# Allegro board ex2_RLC.brd
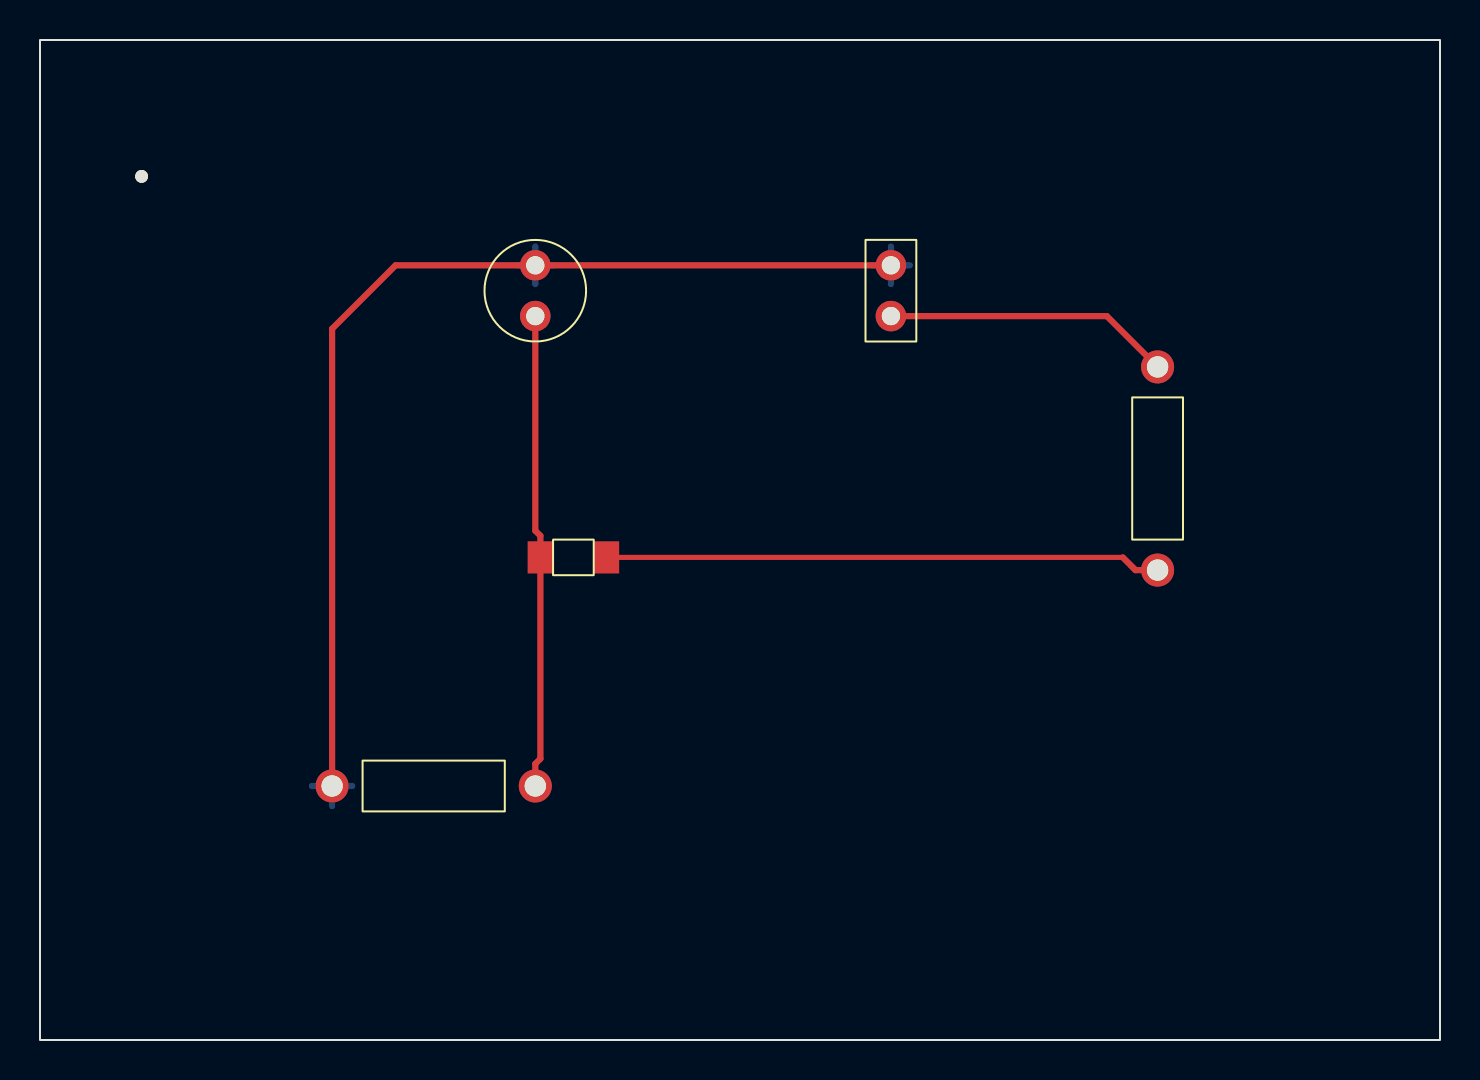
[diagram p0: board, top side]
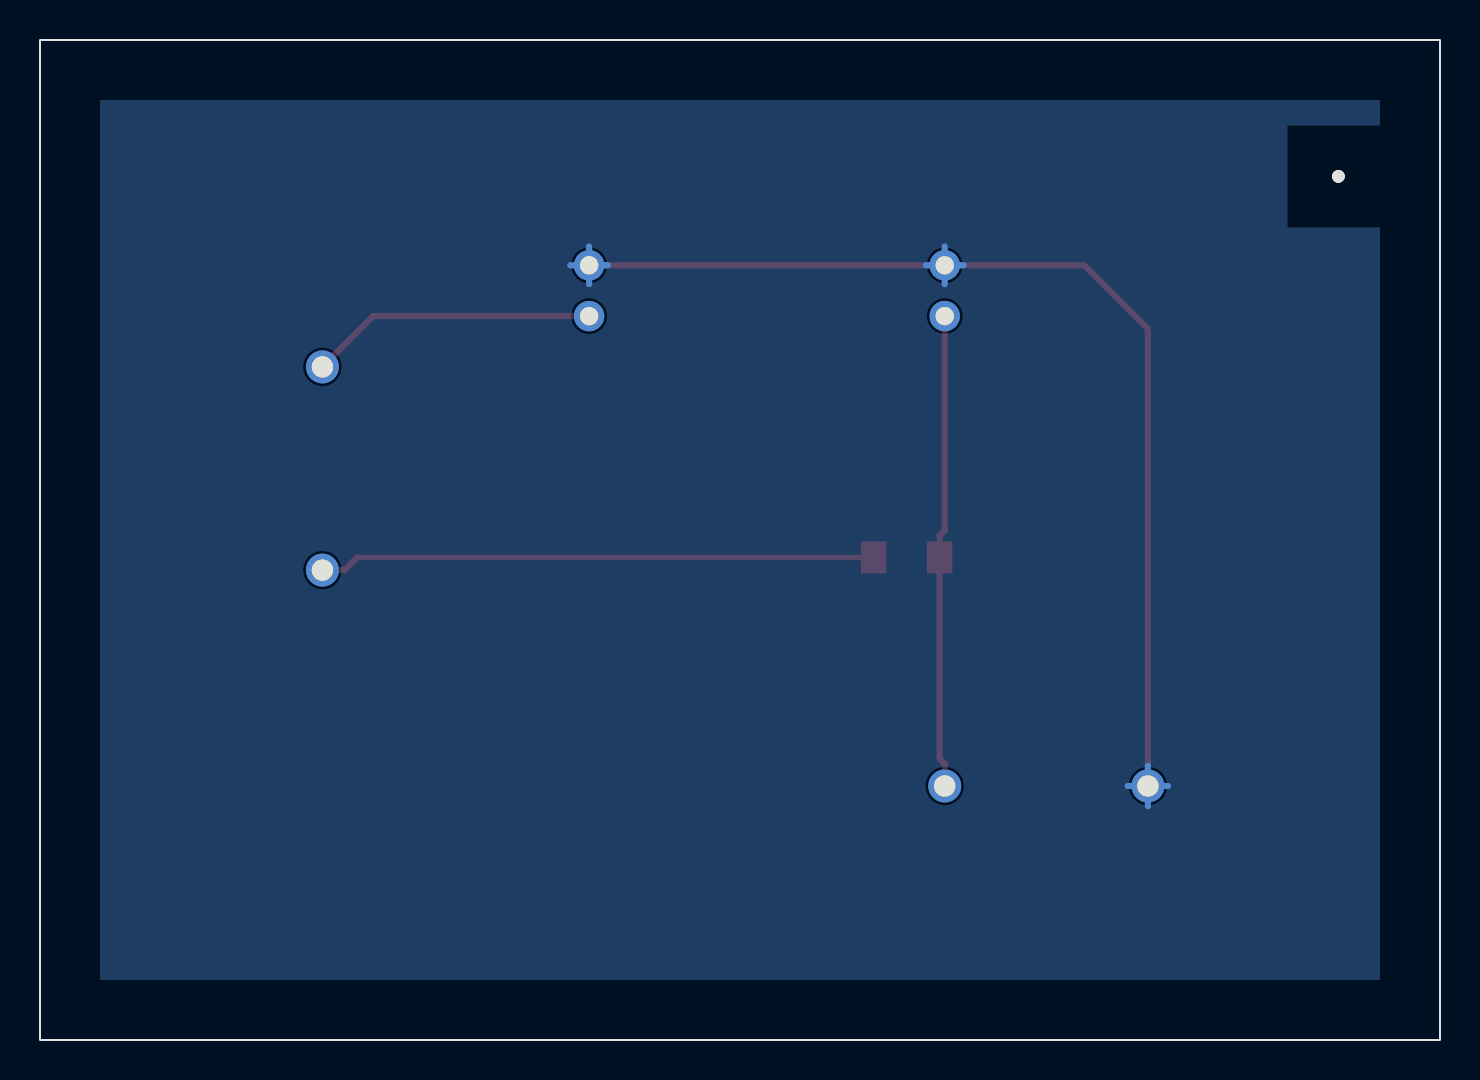
[diagram p1: board, bottom side, seen from below]

Outline 70 x 50 mm; copper layers: TOP, BOTTOM. Coordinates in mm from the lower left corner of the outline.
Outline path: rectangle 0,0 70,50

## Design rules (mm)
net group CLS3: nets N00069
net group POWERNETS: nets VCC

## Placement (name value [footprint] x y rotation side)
C1  1u  [CAP196]  24.77 36.2 0 top
J1  CON2  [JUMPER2]  42.55 36.2 90 top
L1  100n  [SMDRES]  26.67 24.13 180 top
NOREF  -  [unnamed]  5.08 43.18 0 top
R1  330  [RES400]  55.88 33.66 180 top
R2  330  [RES400]  24.77 12.7 90 top

## Library data of the parts
C1 = CAP NP: Tolerance: ***; User Part Number: ***
J1 = CON2: User Part Number: ***
L1 = INDUCTOR: Tolerance: ***; User Part Number: ***
R1 R2 = R: Tolerance: ***; User Part Number: ***

## Footprints (pads in the part's own frame, mm; a bottom-side part is the same pattern mirrored in y, then rotated)
CAP196
  round 1.524 hole 0.914: 1(0,0) 2(0,2.54)
JUMPER2
  round 1.524 hole 0.914: 1(0,0) 2(2.54,0)
RES400
  round 1.651 hole 1.067: 1(0,0) 2(0,10.16)
SMDRES
  rect 1.27x1.6 smd: 1(-1.651,0) 2(1.651,0)
unnamed
  round 0.635 hole 3.175 unplated: (0,0)

## Nets
GND: C1.2 J1.2 R2.2
VCC: J1.1 R1.1
N00069: L1.1 R1.2
N00128: C1.1 L1.2 R2.1

## Routing (per net, layer and track width the routed paths; a pad name or vN(x,y) marks a point on that pad's centre or on a via; arc(x,y) is an arc through that point)
GND: length 63.7
  TOP w0.308: R2.2 14.61,35.56 17.78,38.73 C1.2 J1.2
  BOTTOM w0.308: J1.2 43.49,38.73 ; J1.2 42.55,37.79 ; J1.2 41.6,38.73 ; J1.2 42.55,39.68 ; 13.6,12.7 R2.2 ; R2.2 14.61,11.69 ; R2.2 15.61,12.7 ; R2.2 14.61,13.71 ; 24.77,37.79 C1.2 ; C1.2 25.71,38.73 ; C1.2 24.77,39.68 ; C1.2 23.82,38.73
VCC: length 14.4
  TOP w0.308: R1.1 53.34,36.2 J1.1
N00069: length 28.7
  TOP w0.254: 54.8,23.5 54.16,24.13 L1.1
  TOP w0.308: 54.14,24.13 54.77,23.5 R1.2
N00128: length 23.7
  TOP w0.308: R2.1 24.77,13.81 25.02,14.06 L1.2 25.02,25.21 24.77,25.47 C1.1

## Copper pours and planes (outline as drawn; the poured copper is in the pictures)
GND on BOTTOM: 3,3 3,47 67,47 67,3

Small or netless copper shapes (teardrops, artwork), in the pictures only: 1 on BOTTOM
